# Altium PCB Teststand.PcbDoc
Units mm, origin at the board's own origin, x right, y up, seen from the top; angles counter-clockwise.
Board outline 90.42 x 64.26 mm, 2 copper layers (Top Layer, Bottom Layer); 15 components, 15 nets, 79 pads, 0 vias.
Unrouted connection lines stored in the file: 1.
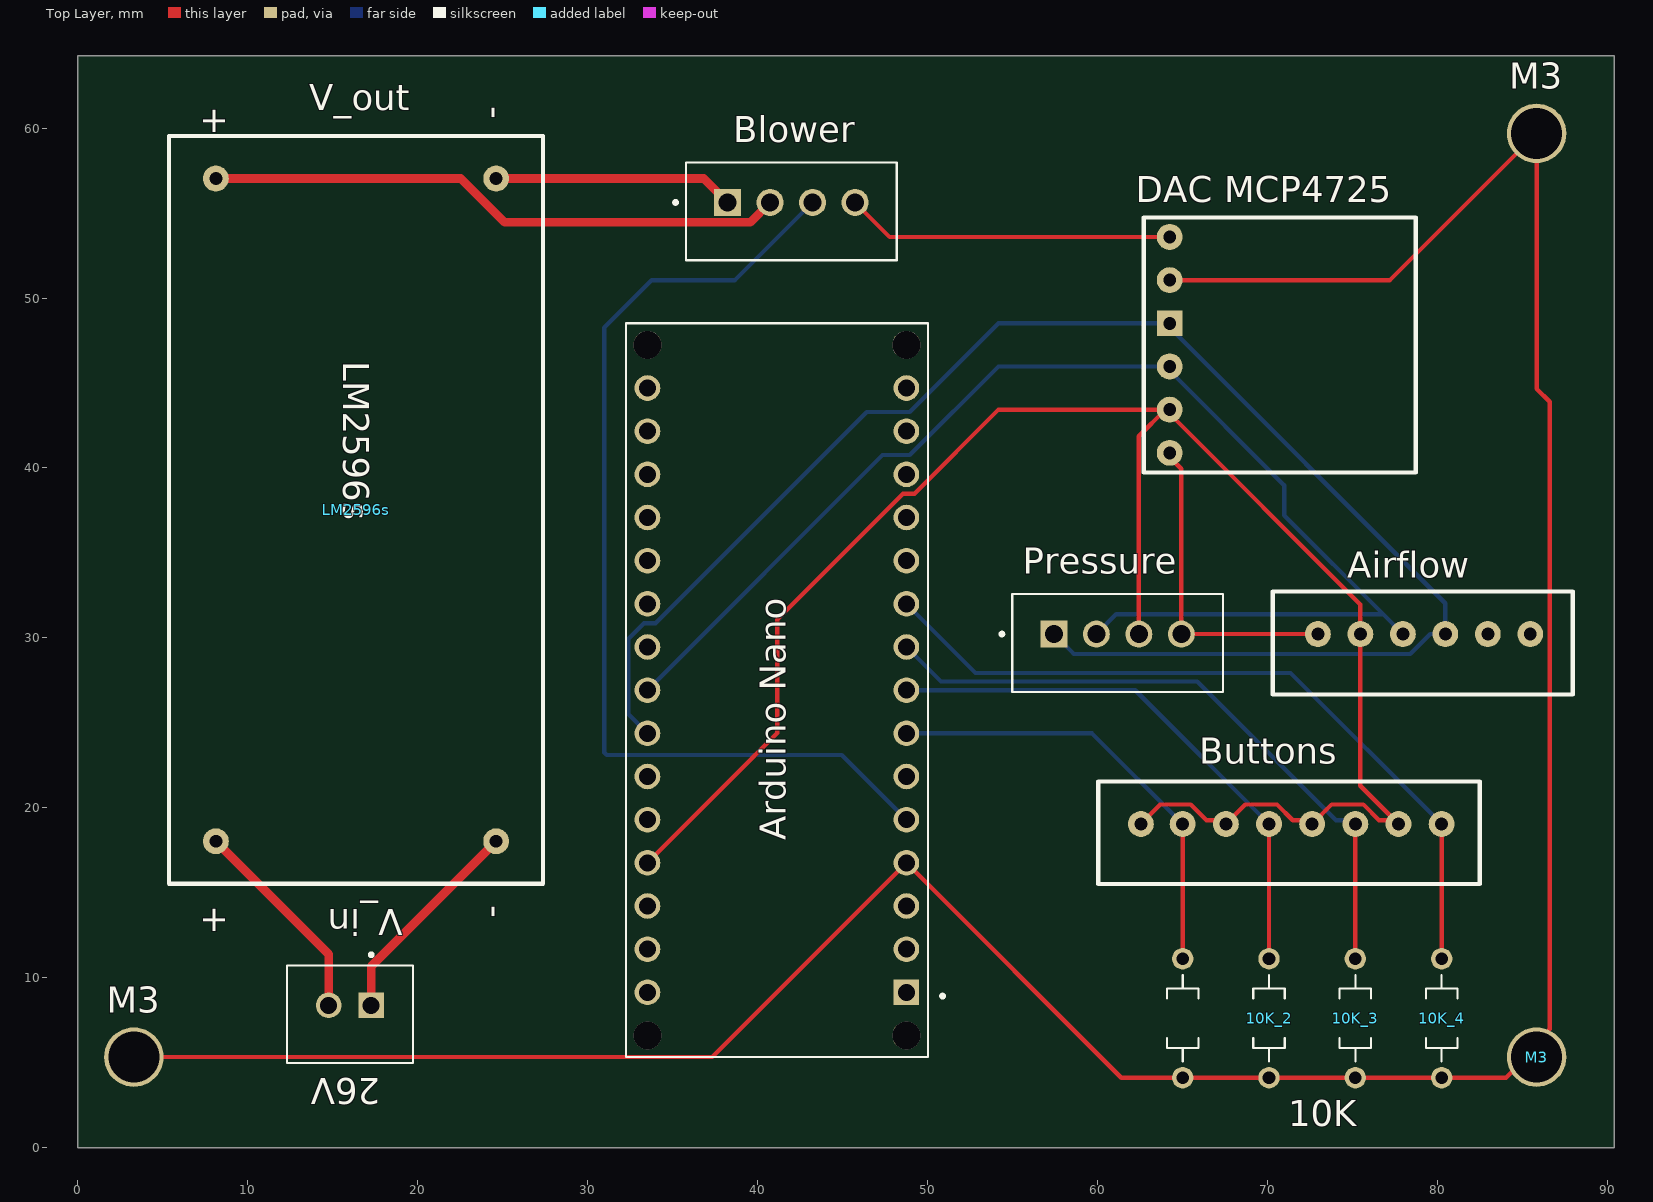
[diagram p0: Top Layer view]
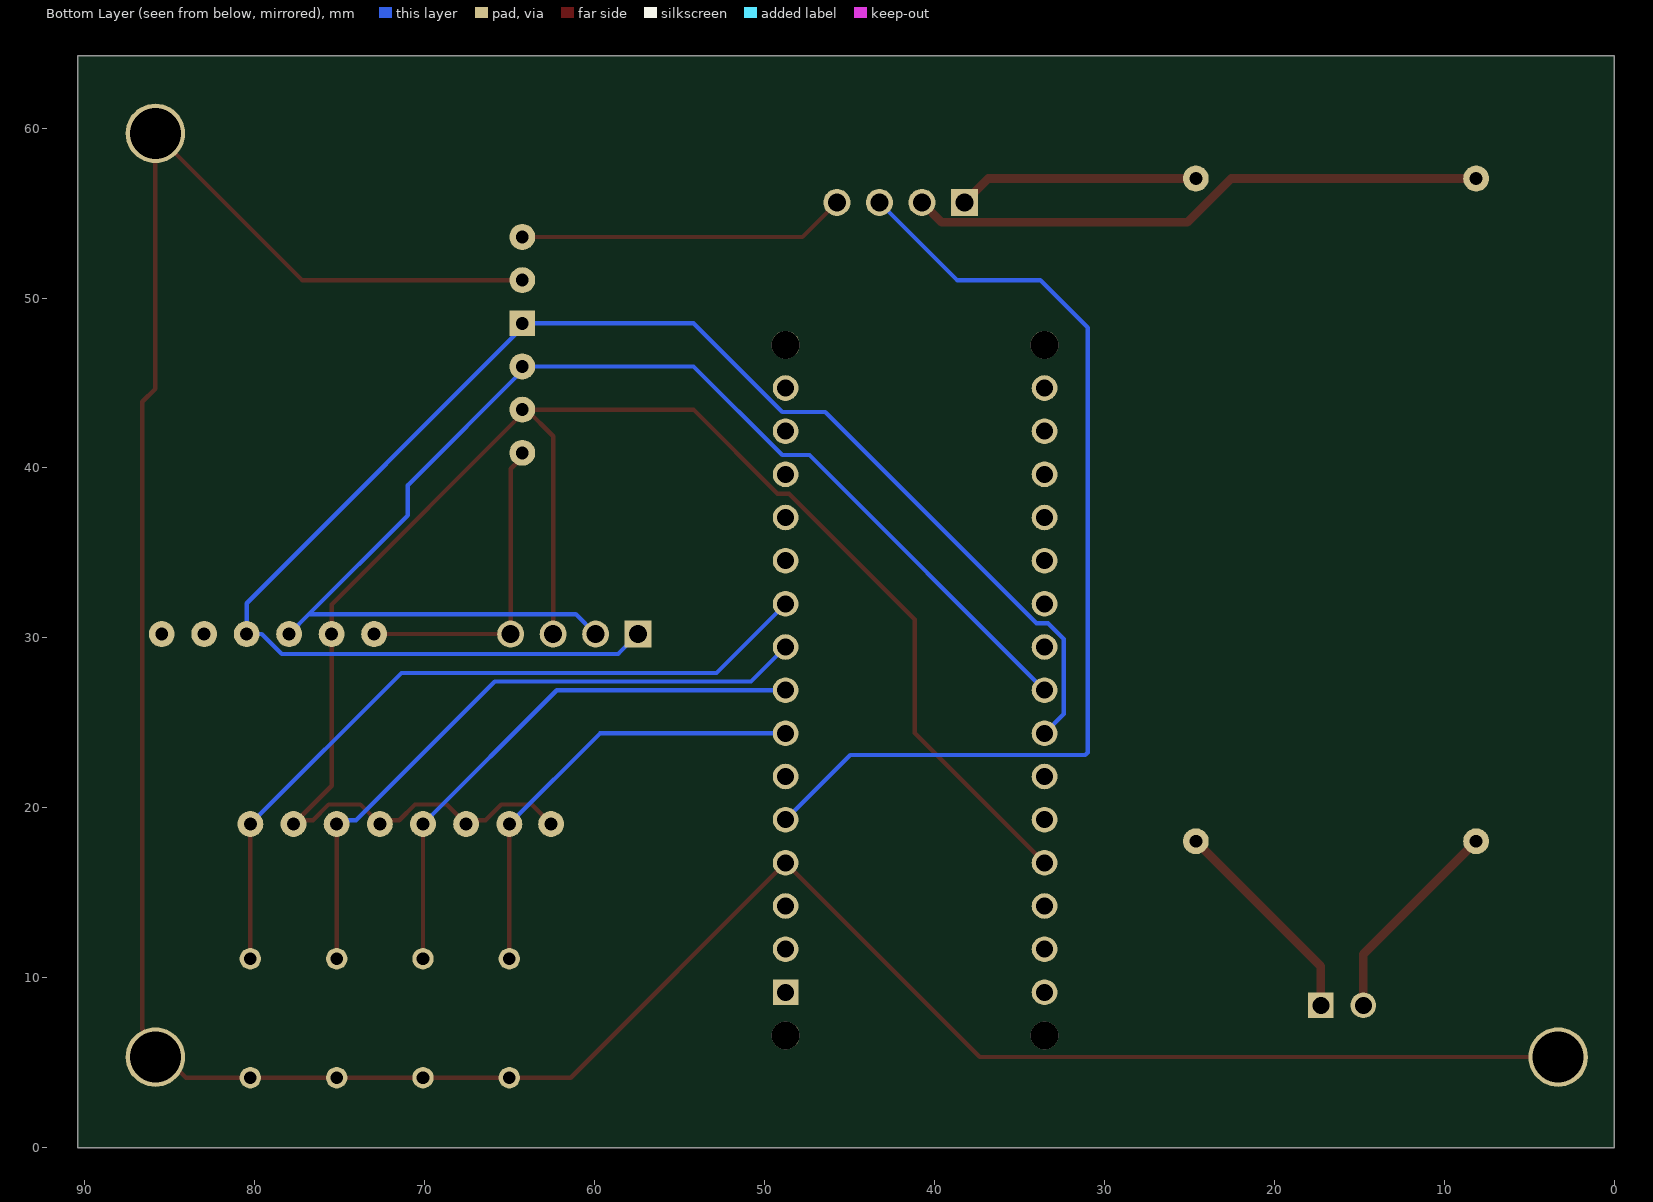
[diagram p1: Bottom Layer view, seen from below]
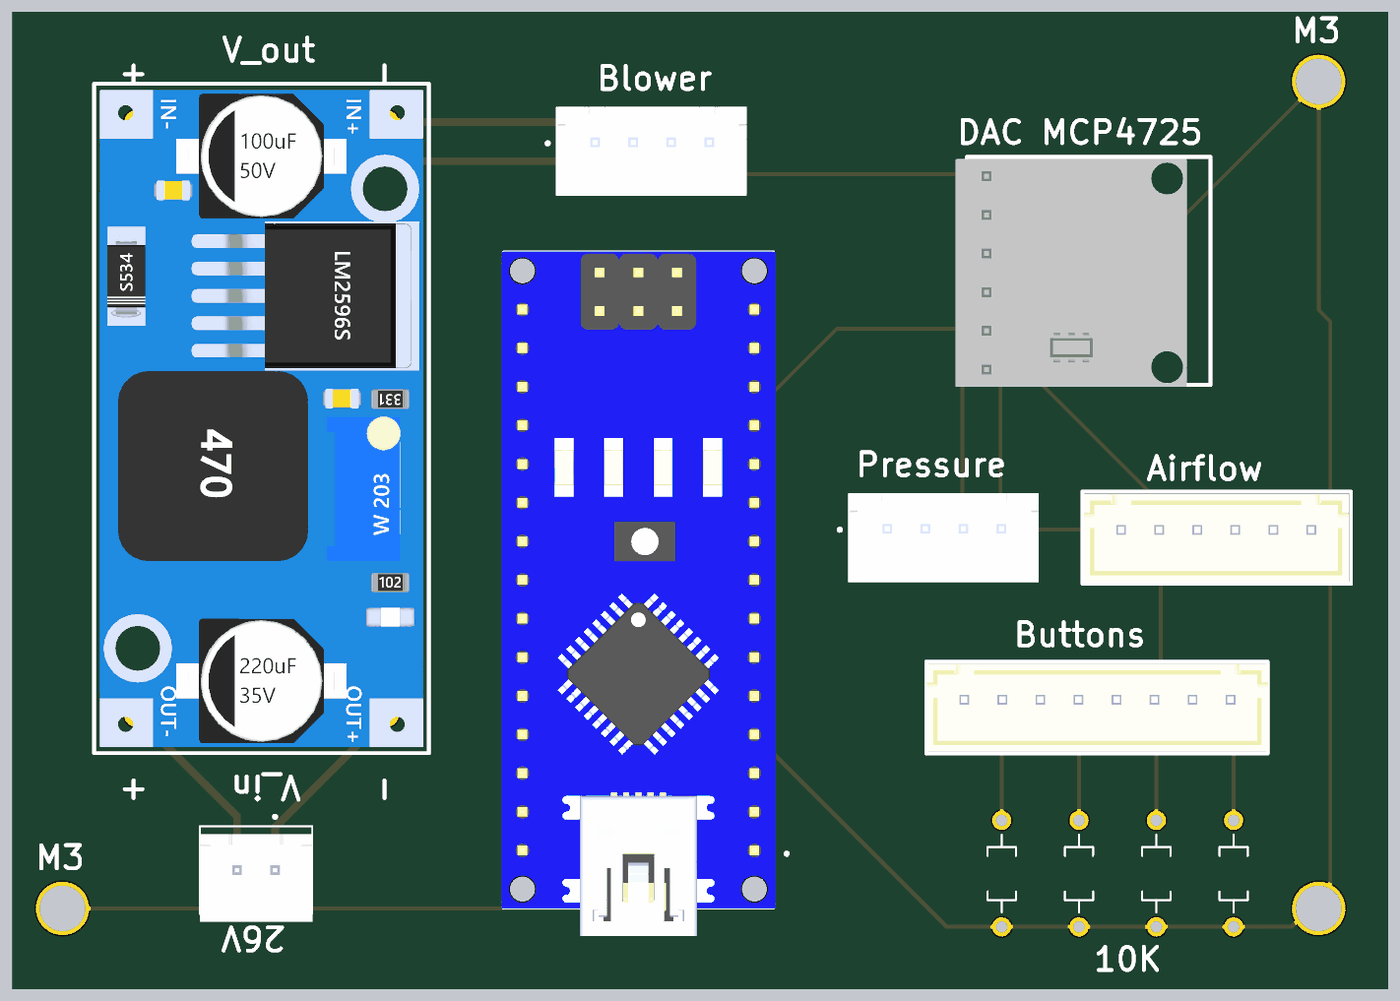
[diagram p2: 3D render of the assembled board from above, using the file's embedded part models]

## Layer stack, top to bottom
Top Solder: solder mask 0.0102, Solder Resist, Dk 3.5
Top Layer: signal copper 0.0356
Dielectric 1: dielectric 0.32, FR-4, Dk 4.8
Bottom Layer: signal copper 0.0356
Bottom Solder: solder mask 0.0102, Solder Resist, Dk 3.5

## Board outline
0,0 90.424,0 90.424,64.262 0,64.262

## Design rules (kind name [scope] priority, off if disabled: settings)
Clearance [All] p1 off: gap=0.254 ignorepadtopadclearanceinfootprint=FALSE except(0: Arc-Hole Track-Hole SMDPad-Hole THPad-Hole Via-Hole Fill-Hole Poly-Hole Region-Hole Text-Hole)
ComponentClearance [All] p1 off: gap=0.254 collisioncheckmode=3 verticalgap=0.254 showdistances=FALSE
Height [All] p1 off: minheight=0 maxheight=25.4 prefheight=12.7
PolygonConnect [All] p1: connectstyle=Relief reliefconductorwidth=0.254 reliefentries=4 polygonreliefangle="90 Angle" airgapwidth=0.254
RoomDefinition Teststand [InComponentClass('Teststand')] p1 off: confinementstyle=ConfineIn formatcopy=TRUE lockcomponents=FALSE outline 57.912,104.902 108.712,104.902 108.712,130.302 57.912,130.302
RoutingVias [All] p1: holewidth=0.711 width=1.27 viastyle="Through Hole" minholewidth=0.711 minwidth=1.27 maxholewidth=0.711 maxwidth=1.27
SolderMaskExpansion [All] p1: expansion=0.102 istentingtop=FALSE
Width [All] p1: maxlimit=0.254 minlimit=0.254 preferedwidth=0.254
28 further rules are at their usual default settings.

## Classes and differential pairs
component class Teststand: 10K 10K_2 10K_3 10K_4 26V Airflow "Arduino Nano" Blower Buttons "DAC MCP4725" LM2596s M3 Pressure v

## Components (designator, comment, footprint, x,y, rotation, side; value= is the part's Value field where it differs from the comment)
10K "2-1623928-8" RESAD700W45L350D185 65.024,7.62 r90 top
10K_2 "2-1623928-8" RESAD700W45L350D185 70.104,7.62 r90 top
10K_3 "2-1623928-8" RESAD700W45L350D185 75.184,7.62 r90 top
10K_4 "2-1623928-8" RESAD700W45L350D185 80.264,7.62 r90 top
26V "B2B-XH-A(LF)(SN)" JST_B2B-XH-A(LF)(SN) 16.022,7.857 r180 top
Airflow "B6B-XH-A -LF-SN" "B6B-XH-A -LF-SN-Footprint-1" 77.978,30.229 r0 top
"Arduino Nano" "A000005" MODULE_A000005 41.148,26.924 r180 top
Blower "B4B-XH-A(LF)(SN)" JST_B4B-XH-A(LF)(SN) 38.246,55.626 r0 top
Buttons "B8B-XH-A(LF)(SN)" B8B-XH-A(LF)(SN)-Footprint-1 67.564,19.05 r0 top
"DAC MCP4725" "MCP4725 Adafruit" "New footprint 1" 64.262,48.514 r0 top
LM2596s "LM2596s AZDelivery" "LM2596s AZDelivery-Footprint-1" 16.378,37.534 r270 top
M3 "3mm Mounting HOle" "3mm Mounting HOle-Footprint-1" 85.852,59.69 r0 top
M3 "3mm Mounting HOle" "3mm Mounting HOle-Footprint-1" 3.302,5.334 r0 top
M3 "3mm Mounting HOle" "3mm Mounting HOle-Footprint-1" 85.852,5.334 r0 top
Pressure "B4B-XH-A(LF)(SN)" JST_B4B-XH-A(LF)(SN) 57.444,30.226 r0 top

## Footprints (in the part's own frame and the unit in brackets; to place one, negate y for a bottom-side part, rotate by r counter-clockwise, add the part's x,y. Pads: shape width x height; smd on the part's side, far side on the other; paste and mask are expansions set on the pad)
"3mm Mounting HOle-Footprint-1" [mm]
  round 3.5 hole 3: 1(0,0)
"B6B-XH-A -LF-SN-Footprint-1" [mil]
  round 60 hole 30: 1(-196.85,0) 2(-98.43,0) 3(0,0) 4(98.43,0) 5(196.85,0) 6(295.28,0)
  silkscreen extent -301,-140 394,98, body extent -298,-134 388,92, height 276
B8B-XH-A(LF)(SN)-Footprint-1 [mil]
  round 60 hole 30: 1(-196.85,0) 2(-100,0) 3(0,0) 4(100,0) 5(200,0) 6(300,0) 7(400,0) 8(500,0)
  silkscreen extent -295,-139 588,98, body extent -293,-134 589,93, height 276
JST_B2B-XH-A(LF)(SN) [mm]
  rect 1.508x1.508 hole 1: 1(-1.25,-0.525)
  round 1.508 hole 1: 2(1.25,-0.525)
  silkscreen extent -3.7,-3.6 3.7,2.88, body extent -3.7,-2.35 3.7,3.4, height 7
JST_B4B-XH-A(LF)(SN) [mm]
  rect 1.59x1.59 hole 1.06: 1(0,0)
  round 1.59 hole 1.06: 2(2.5,0) 3(5,0) 4(7.5,0)
  silkscreen extent -3.16,-3.4 9.95,2.35, body extent -2.39,-3.34 10.01,2.41, height 7
"LM2596s AZDelivery-Footprint-1" [mil]
  round 60 hole 30: 1(-767.72,324.8) 2(-767.72,-324.8) 3(767.72,-324.8) 4(767.72,324.8)
  silkscreen extent -866,-433 866,433, body extent -850,-418 850,418, height 526
MODULE_A000005 [mm]
  rect 1.508x1.508 hole 1: 1(-7.62,17.78)
  round 1.508 hole 1: 2(-7.62,15.24) 3(-7.62,12.7) 4(-7.62,10.16) 5(-7.62,7.62) 6(-7.62,5.08) 7(-7.62,2.54) 8(-7.62,0) 9(-7.62,-2.54) 10(-7.62,-5.08) 11(-7.62,-7.62) 12(-7.62,-10.16) 13(-7.62,-12.7) 14(-7.62,-15.24) 15(-7.62,-17.78) 16(7.62,-17.78) 17(7.62,-15.24) 18(7.62,-12.7) 19(7.62,-10.16) 20(7.62,-7.62) 21(7.62,-5.08) 22(7.62,-2.54) 23(7.62,0) 24(7.62,2.54) 25(7.62,5.08) 26(7.62,7.62) 27(7.62,10.16) 28(7.62,12.7) 29(7.62,15.24) 30(7.62,17.78)
  round 1.651 hole 1.651 unplated: ""(-7.62,20.32) ""(-7.62,-20.32) ""(7.62,20.32) ""(7.62,-20.32)
  silkscreen extent -9.85,-21.59 8.89,21.59, body extent -9,-21.6 9,23.4, height 12.6
"New footprint 1" [mil]
  round 60 hole 30: 1(0,200) 2(0,100) 4(0,-100) 5(0,-200) 6(0,-300)
  rect 60x60 hole 30: 3(0,0)
  silkscreen extent -60,-346 570,245, body extent -89,-351 509,240, height 224
RESAD700W45L350D185 [mm]
  round 1.258 hole 0.75: 1(-3.5,0) 2(3.5,0)
  silkscreen extent -2.55,-0.92 2.55,0.92

## Part data
10K 10K_2 10K_3 10K_4: "CFR16 5% 10K", Package=None, Availability=Unavailable, MF="{'manufacturer': u'TE Connectivity'}", MP=2-1623928-8, Price=None
26V: "XH Series 2 Position 2.5 mm Pitch Through Hole Top Entry Shrouded Header", Package=None, Availability=Unavailable, MF="{'manufacturer': u'JST Sales America Inc.'}", MP=B2B-XH-A(LF)(SN), Price=None
Airflow: library part CMP-002-00073-1, "Connector Header, XH Series, 6 Position, 2.50mm, Through Hole, Press-Fit, Solder, Natural"
"Arduino Nano": "CLOCK SAW OSCILLATOR SEAM7050 T&", Package=None, Availability=Unavailable, MF="{'manufacturer': u'Arduino'}", MP=A000005, Price=None
Blower Pressure: library part CMP-003-000000-3, "XH Series 4 Position 2.5 mm Pitch Through Hole Crimp Top Entry Shrouded Header", Package=None, Availability=Unavailable, Design Item ID=B4B-XH-A(LF)(SN), MF="{'manufacturer': u'JST Sales America Inc.'}", MP=B4B-XH-A(LF)(SN), Price=None, Source=B4B-XH-A(LF)(SN).SchLib
Buttons: library part CMP-002-00072-2, "Conn Shrouded Header HDR 8 POS 2.5mm Solder ST Thru-Hole Box"
"DAC MCP4725": library part CMP-001-0000-2, "IC for MCP4725"
LM2596s: library part CMP-019-00049-2, "IC LM2596s"
M3 M3 M3: library part CMP-001-0002-1, "2mm Mounting HOle"

## Nets (pads, with @x,y where several pads share a name; then routed paths per layer and width w, separated by ;. In a path a pad name is that pad's centre, name@x,y a point inside that pad or via, vN(x,y) a via of type N, cw(c..) or ccw(c..) an arc to the next point about the centre after c; other vN are vias at no path point)
GND: 10K.1 10K_2.1 10K_3.1 10K_4.1 "Arduino Nano.4" "DAC MCP4725.2" "DAC MCP4725.6" Airflow.1 M3.1 Pressure.4 | length 192.5
  Top Layer w0.254: M3.1@3.302,5.334 37.338,5.334 48.768,16.764 61.412,4.12 10K.1 10K_2.1 10K_3.1 10K_4.1 84.052,4.12 85.266,5.334 85.852,5.334 85.852,6.212 86.621,6.981 86.621,43.899 85.852,44.668 85.852,59.69 77.216,51.054 64.008,51.054 ; 64.008,40.894 64.944,39.958 Pressure.4 64.946,30.228 Airflow.1 Airflow.1
Net10K_2: 10K.2 "Arduino Nano.7" Buttons.2 | length 26.4
  Top Layer w0.254: 10K.2 Buttons.2
  Bottom Layer w0.254: 48.768,24.384 59.69,24.384 Buttons.2
Net10K_2_2: 10K_2.2 "Arduino Nano.8" Buttons.4 | length 32.5
  Top Layer w0.254: 10K_2.2 Buttons.4
  Bottom Layer w0.254: 48.768,26.924 62.23,26.924 Buttons.4
Net10K_3_2: 10K_3.2 "Arduino Nano.9" Buttons.6 | length 38.7
  Top Layer w0.254: 10K_3.2 Buttons.6
  Bottom Layer w0.254: 48.768,29.464 50.8,27.432 65.878,27.432 74.041,19.269 74.965,19.269 Buttons.6
Net10K_4_2: 10K_4.2 "Arduino Nano.10" Buttons.8 | length 44.8
  Top Layer w0.254: 10K_4.2 Buttons.8
  Bottom Layer w0.254: 48.768,32.004 52.832,27.94 71.374,27.94 Buttons.8
Net26V_1: 26V.1 LM2596s.4 | length 12.7
  Top Layer w0.508: 26V.1 17.272,10.678 LM2596s.4
Net26V_2: 26V.2 LM2596s.3 | length 12.4
  Top Layer w0.508: LM2596s.3 14.772,11.39 26V.2
NetAirflow_2: "Arduino Nano.27" "DAC MCP4725.5" Airflow.2 Buttons.1 Buttons.3 Buttons.5 Buttons.7 Pressure.3 | length 107.1
  Top Layer w0.254: 33.528,16.764 41.168,24.404 41.168,31.089 48.568,38.489 49.238,38.489 54.183,43.434 64.008,43.434 ; Pressure.3 62.444,41.87 64.008,43.434 ; Buttons.1 63.707,20.193 65.497,20.193 66.421,19.269 67.345,19.269 Buttons.3 68.707,20.193 70.577,20.193 71.501,19.269 72.425,19.269 Buttons.5 73.787,20.193 75.657,20.193 76.581,19.269 Buttons.7@77.505,19.269 ; Buttons.7 Buttons.7@77.505,19.269 ; 64.008,43.434 75.478,31.964 Airflow.2 75.478,21.296 Buttons.7@77.505,19.269
NetAirflow_3: "Arduino Nano.23" "DAC MCP4725.4" Airflow.3 Pressure.2 | length 77.3
  Bottom Layer w0.254: 33.528,26.924 47.363,40.759 48.968,40.759 54.183,45.974 64.008,45.974 70.993,38.989 70.993,37.214 76.805,31.402 ; Pressure.2 61.12,31.402 76.805,31.402 ; Airflow.3 76.805,31.402
NetAirflow_4: "Arduino Nano.24" "DAC MCP4725.3" Airflow.4 Pressure.1 | length 94.8
  Bottom Layer w0.254: 33.528,24.384 32.393,25.519 32.393,29.934 33.328,30.869 33.998,30.869 46.428,43.299 48.968,43.299 54.183,48.514 64.008,48.514 80.478,32.044 Airflow.4 ; Pressure.1 58.62,29.05 78.415,29.05 79.594,30.229 Airflow.4 ; Airflow.4@80.235,29.986 Airflow.4
"NetArduino Nano_5": "Arduino Nano.5" Blower.3 | length 59.7
  Bottom Layer w0.254: Blower.3 38.674,51.054 33.782,51.054 30.988,48.26 30.988,23.263 31.137,23.114 44.958,23.114 48.768,19.304
"NetArduino Nano_29": "Arduino Nano.29"
NetBlower_1: Blower.1 LM2596s.1 | length 14.2
  Top Layer w0.508: LM2596s.1 36.838,57.034 Blower.1
NetBlower_2: Blower.2 LM2596s.2 | length 34.2
  Top Layer w0.508: LM2596s.2 22.543,57.034 25.127,54.45 39.57,54.45 Blower.2
NetBlower_4: "DAC MCP4725.1" Blower.4 | length 19.1
  Top Layer w0.254: Blower.4 47.778,53.594 64.008,53.594
pads on no net: "Arduino Nano.1" "Arduino Nano.2" "Arduino Nano.3" "Arduino Nano.6" "Arduino Nano.11" "Arduino Nano.12" "Arduino Nano.13" "Arduino Nano.14" "Arduino Nano.15" "Arduino Nano.16" "Arduino Nano.17" "Arduino Nano.18" "Arduino Nano.19" "Arduino Nano.20" "Arduino Nano.21" "Arduino Nano.22" "Arduino Nano.25" "Arduino Nano.26" "Arduino Nano.28" "Arduino Nano.30" "Arduino Nano." Airflow.5 Airflow.6

## Text inside footprints (layer, text, board x,y; h text height)
LM2596s: Top Overlay "-" at 23.87,61.28 h1.52 r270; Top Overlay "+" at 7.378,61.28 h1.52 r270; Top Overlay "V_out" at 13.632,61.042 h1.52; Top Overlay "-" at 23.87,14.28 h1.52 r270; Top Overlay "+" at 7.378,14.28 h1.52 r270; Top Overlay "V_in" at 19.124,14.026 h1.52 r180